# Altium PCB STM32F446DEV.PcbDoc
Units mm, origin at the board's own origin, x right, y up, seen from the top; angles counter-clockwise.
Board outline 40 x 40 mm, 2 copper layers (Top Layer, Bottom Layer); 14 components, 60 nets, 149 pads, 61 vias.
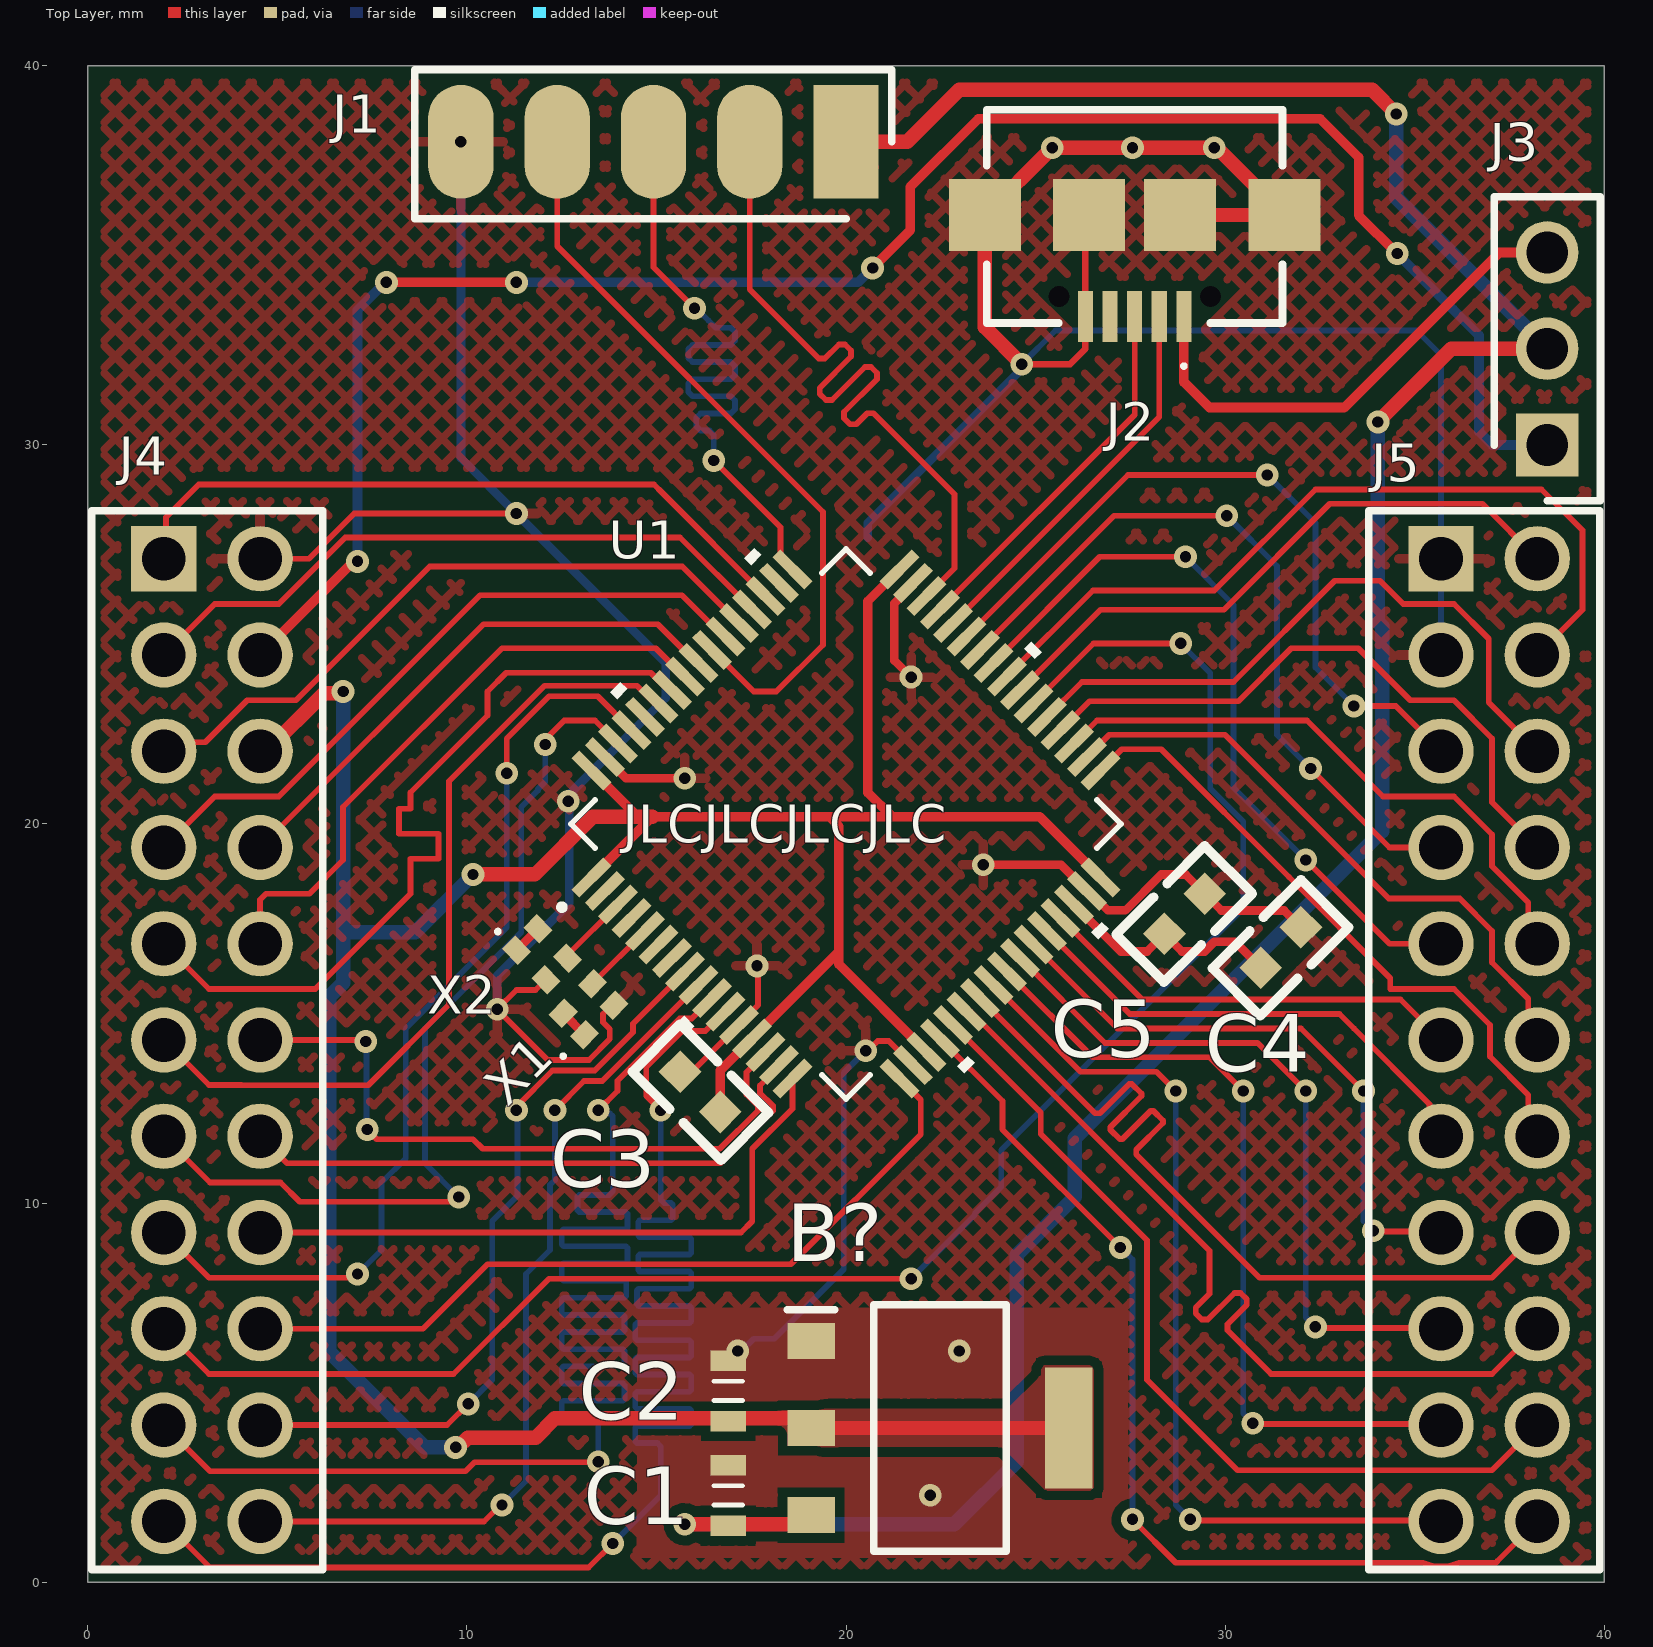
[diagram p0: Top Layer view]
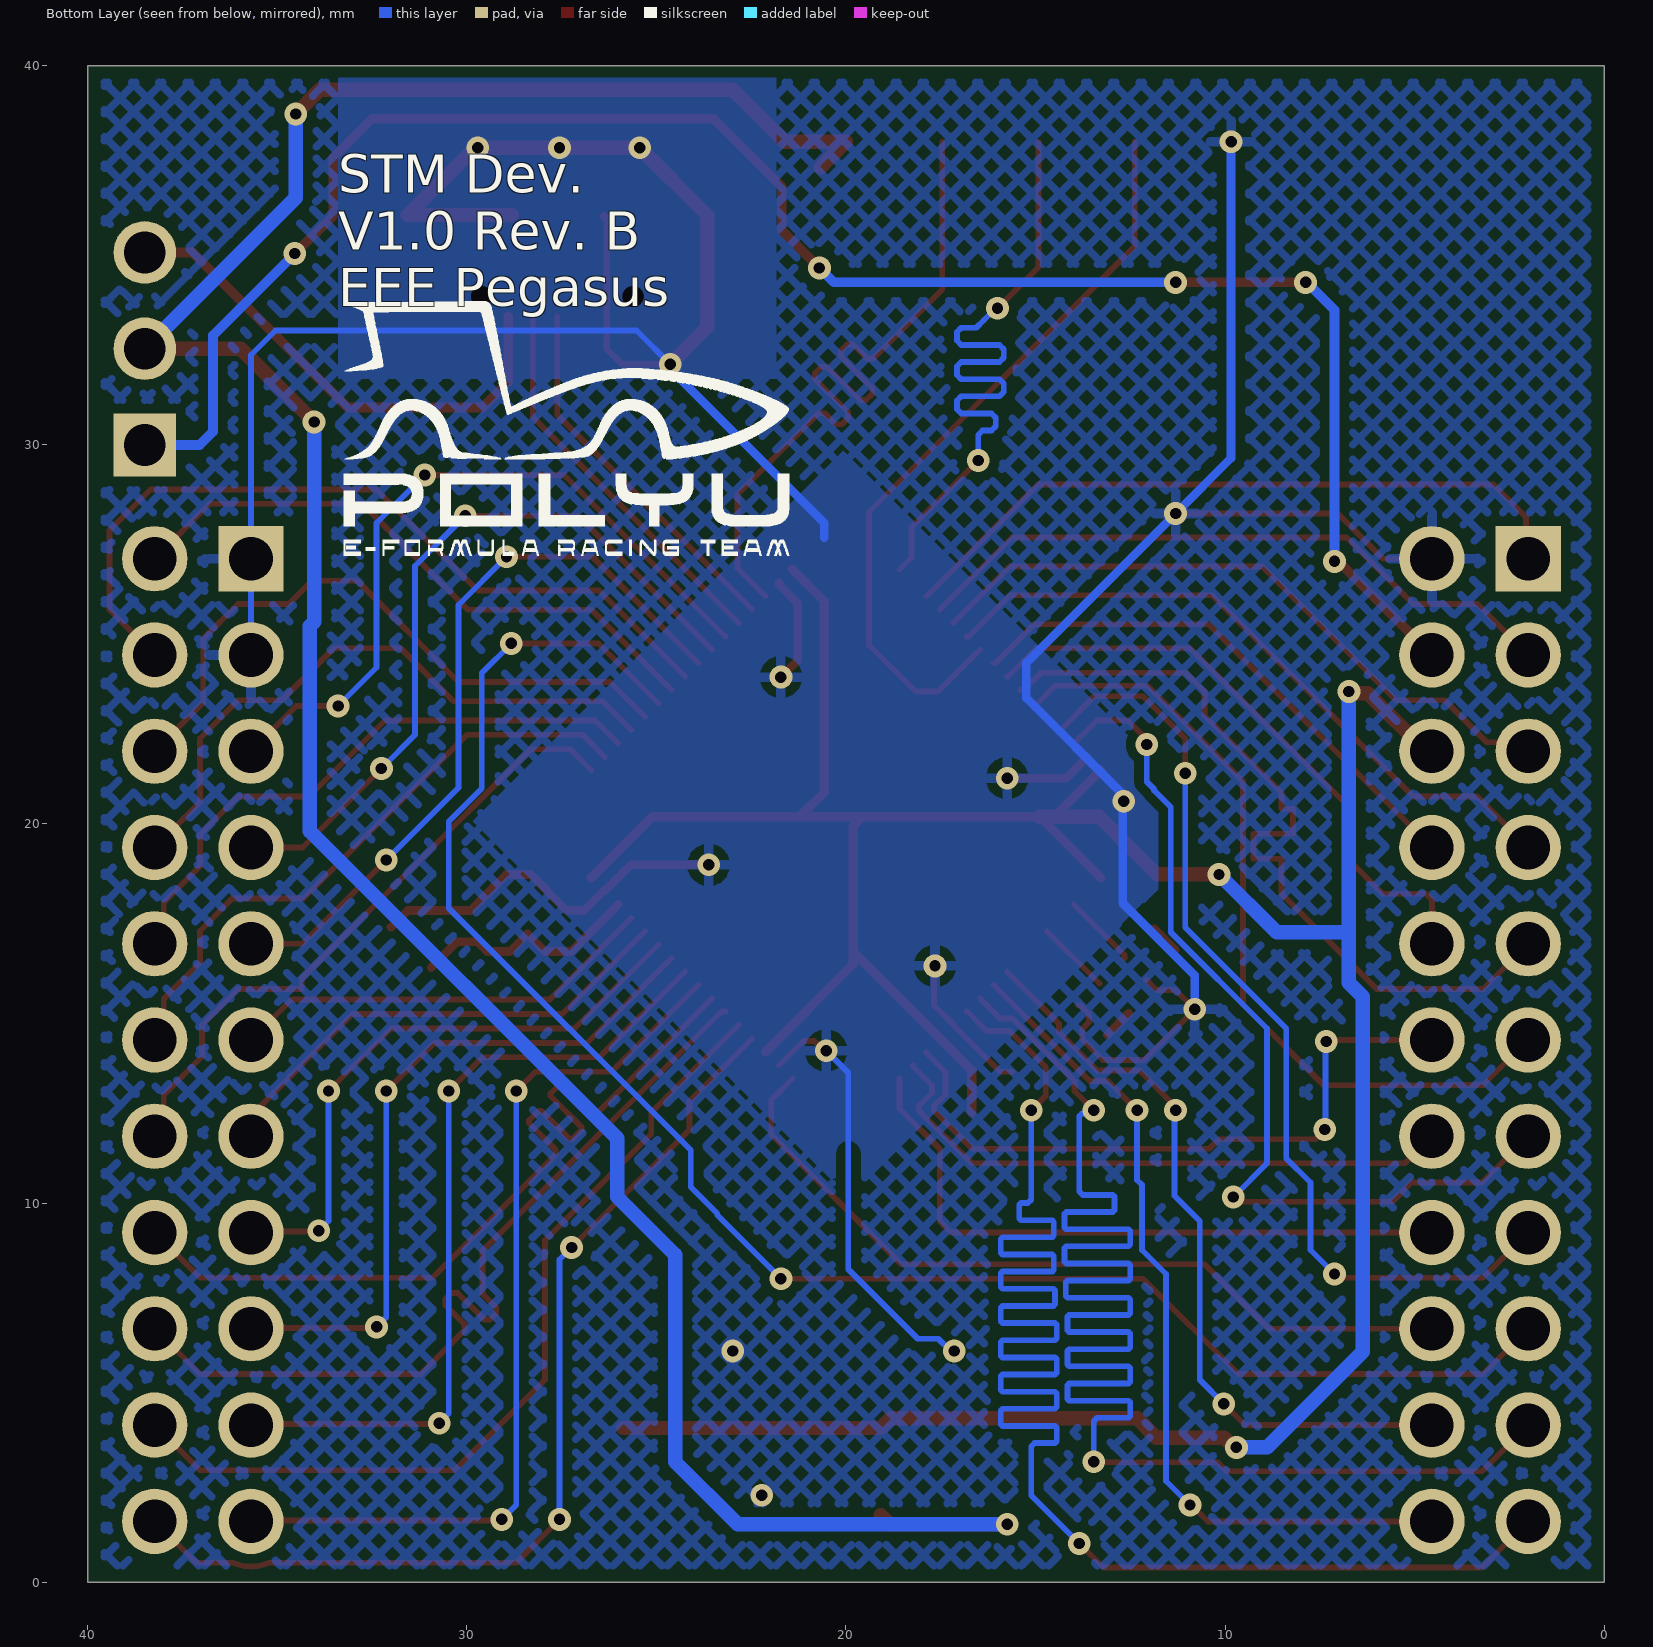
[diagram p1: Bottom Layer view, seen from below]
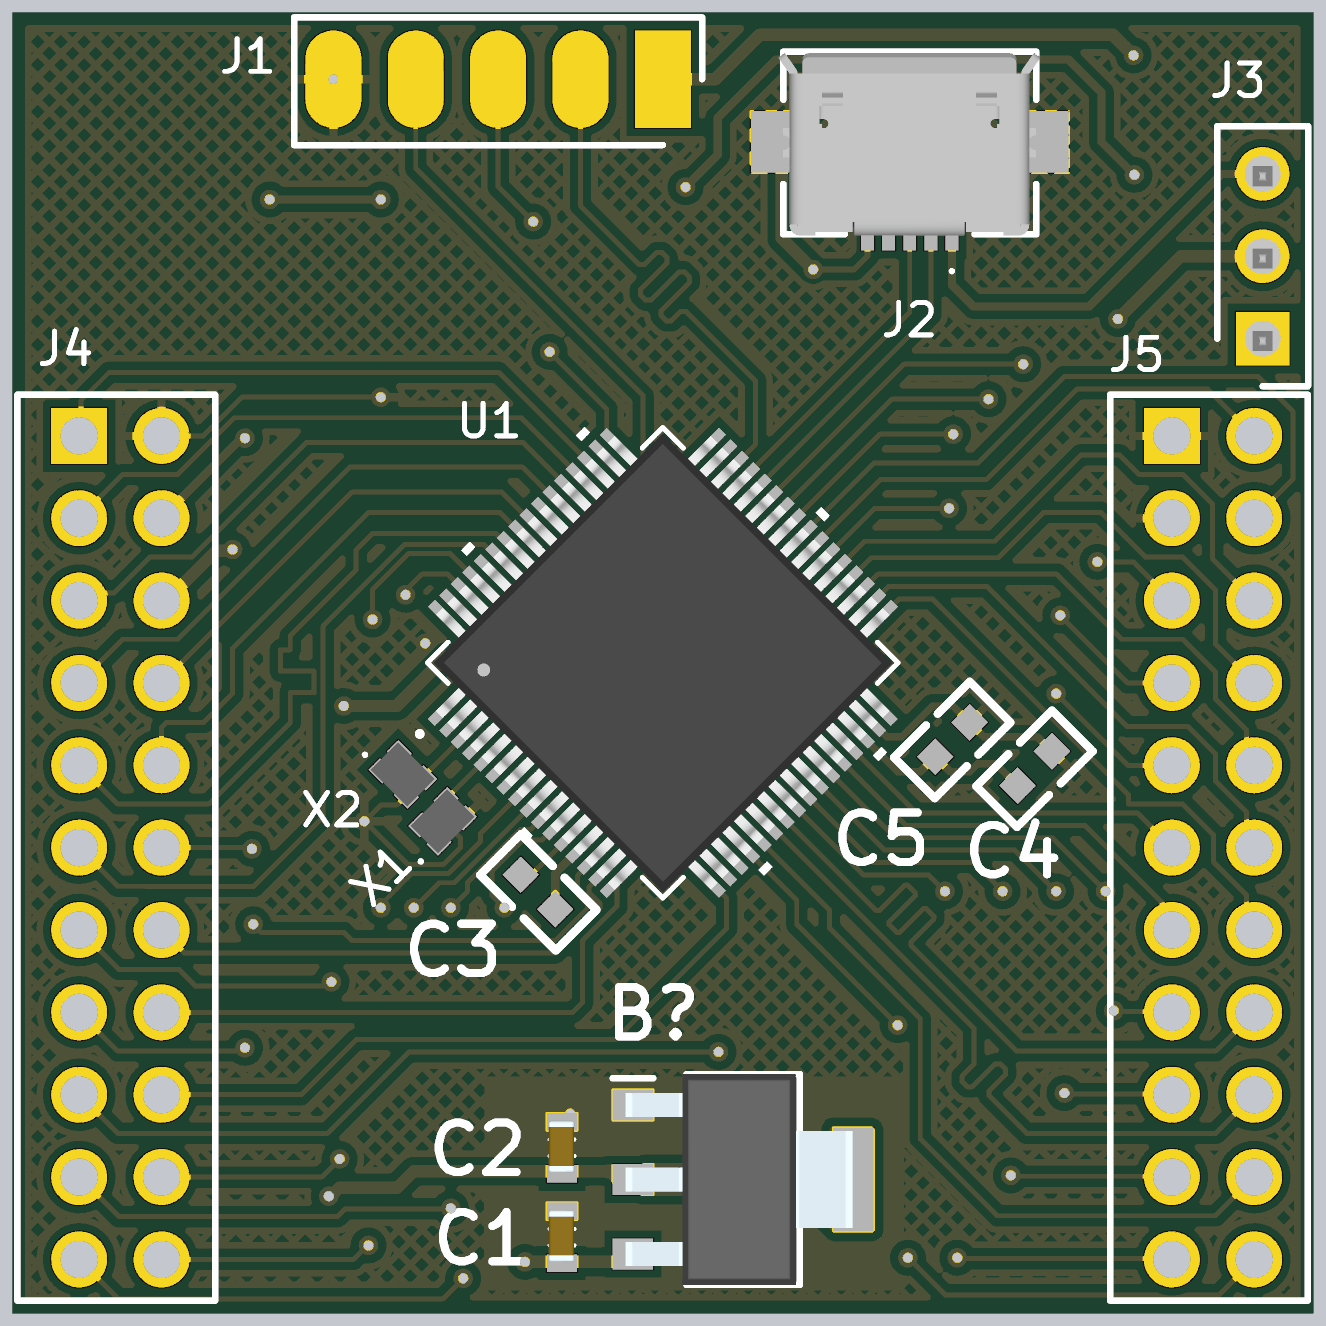
[diagram p2: 3D render of the assembled board from above, using the file's embedded part models]

## Layer stack, top to bottom
Top Solder: solder mask 0.0102, Solder Resist, Dk 3.5
Top Layer: signal copper 0.035
Dielectric 1: dielectric 0.32, FR-4, Dk 4.8
Bottom Layer: signal copper 0.035
Bottom Solder: solder mask 0.0102, Solder Resist, Dk 3.5

## Board outline
0,0 40,0 40,40 0,40

## Design rules (kind name [scope] priority, off if disabled: settings)
BoardOutlineClearance [All] p1: gap=0.3 ignorepadtopadclearanceinfootprint=FALSE except(0: Arc-SplitContinuation Track-SplitContinuation SMDPad-SplitContinuation THPad-OutlineEdge THPad-CavityEdge THPad-CutoutEdge THPad-SplitBarrior THPad-SplitContinuation Via-OutlineEdge Via-CavityEdge Via-CutoutEdge Via-SplitBarrior Via-SplitContinuation Fill-SplitContinuation Poly-SplitContinuation Region-SplitContinuation Text-SplitContinuation)
Clearance [All] p1: gap=0.254 ignorepadtopadclearanceinfootprint=TRUE except(0: Arc-Hole Track-Hole SMDPad-Hole THPad-Hole Via-Hole Fill-Hole Poly-Hole Region-Hole Text-Hole; 0.127: Arc-Arc Arc-Track Track-Track SMDPad-SMDPad; 0.2: Arc-SMDPad Track-SMDPad; 0.5: SMDPad-THPad THPad-THPad THPad-Via)
DiffPairsRouting "Schematic Differential Pairs Routing_1" [InNetClass('CAN1')] p1: maxlimit=0.254 minlimit=0.127 mostfreqgap=0.254 toplayer_minwidth=0.127 toplayer_maxwidth=0.381 toplayer_prefwidth=0.254 bottomlayer_minwidth=0.127 bottomlayer_maxwidth=0.381 bottomlayer_prefwidth=0.254 maxuncoupledlength=1
DiffPairsRouting "Schematic Differential Pairs Routing" [InNetClass('CAN2')] p2: maxlimit=0.254 minlimit=0.127 mostfreqgap=0.254 toplayer_minwidth=0.127 toplayer_maxwidth=0.381 toplayer_prefwidth=0.254 bottomlayer_minwidth=0.127 bottomlayer_maxwidth=0.381 bottomlayer_prefwidth=0.254 maxuncoupledlength=1
DiffPairsRouting [All] p3: maxlimit=0.384 minlimit=0.254 mostfreqgap=0.254 toplayer_minwidth=0.076 toplayer_maxwidth=0.381 toplayer_prefwidth=0.178 bottomlayer_minwidth=0.076 bottomlayer_maxwidth=0.381 bottomlayer_prefwidth=0.178 maxuncoupledlength=12.7
HoleSize [All] p1: absolutevalues=TRUE maxlimit=6.3 minlimit=0.3 maxpercent=80.000 minpercent=20.000
HoleToHoleClearance [All] p1: gap=0.6 allowstackedmicrovias=TRUE
MatchedLengths "Schematic Matched Net Lengths_7" [InNetClass('EADC1')] p1: tolerance=1 checknetsindiffpair=FALSE checkdiffpairvsdiffpair=TRUE checkxsignals=TRUE checkothers=TRUE
MatchedLengths "Schematic Matched Net Lengths_6" [InNetClass('I2C')] p2: tolerance=1 checknetsindiffpair=FALSE checkdiffpairvsdiffpair=TRUE checkxsignals=TRUE checkothers=TRUE
MatchedLengths "Schematic Matched Net Lengths_5" [InNetClass('UART1')] p3: tolerance=1 checknetsindiffpair=FALSE checkdiffpairvsdiffpair=TRUE checkxsignals=TRUE checkothers=TRUE
MatchedLengths "Schematic Matched Net Lengths_4" [InNetClass('SWD')] p4: tolerance=1 checknetsindiffpair=FALSE checkdiffpairvsdiffpair=TRUE checkxsignals=TRUE checkothers=TRUE
MatchedLengths "Schematic Matched Net Lengths_3" [InNetClass('CAN1')] p5: tolerance=1 checknetsindiffpair=FALSE checkdiffpairvsdiffpair=TRUE checkxsignals=TRUE checkothers=TRUE
MatchedLengths "Schematic Matched Net Lengths_2" [InNetClass('CAN2')] p6: tolerance=1 checknetsindiffpair=FALSE checkdiffpairvsdiffpair=TRUE checkxsignals=TRUE checkothers=TRUE
MatchedLengths "Schematic Matched Net Lengths_1" [InNetClass('EADC2')] p7: tolerance=1 checknetsindiffpair=FALSE checkdiffpairvsdiffpair=TRUE checkxsignals=TRUE checkothers=TRUE
MatchedLengths "Schematic Matched Net Lengths" [InNetClass('UART2')] p8: tolerance=1 checknetsindiffpair=FALSE checkdiffpairvsdiffpair=TRUE checkxsignals=TRUE checkothers=TRUE
MinimumAnnularRing [All] p1: minimumring=0.13
MinimumSolderMaskSliver [All] p1: minsoldermaskwidth=0.127
PolygonConnect [All] p1: connectstyle=Relief reliefconductorwidth=0.254 reliefentries=4 polygonreliefangle="90 Angle" airgapwidth=0.254
RoutingCorners [All] p1: cornerstyle=45-Degree minsetback=1.27 maxsetback=1.27
RoutingPriority [Not(InNetClass('Power'))] p1: routingpriority=1
RoutingVias [All] p1: holewidth=0.5 width=1 viastyle="Through Hole" minholewidth=0.3 minwidth=0.5 maxholewidth=1 maxwidth=1.27
SMDNeckDown [All] p1: percent=90.000
SMDToPlane [All] p1: distance=0
SilkToSilkClearance [All] p1: silktosilkclearance=0.127
SilkToSolderMaskClearance [IsPad] p1: minsilkscreentomaskgap=0.15 clearancetoexposedcopper=TRUE
SolderMaskExpansion [All] p1: expansion=0.038 istentingtop=FALSE
UnRoutedNet [All] p1: checkbadconnections=TRUE
ViasUnderSMD [All] p1: allowed=TRUE
Width PowerTraceWidth [InNetClass('Power')] p1: maxlimit=0.384 minlimit=0.254 preferedwidth=0.254
Width [InNetClass('All Nets')] p2: maxlimit=0.384 minlimit=0.127 preferedwidth=0.152
21 further rules are at their usual default settings.

## Classes and differential pairs
net class UART2: UART_DBG_RX UART_DBG_TX
net class UART1: BQ796XX_RX BQ796XX_TX
net class SWD: SWD_CLK SWD_IO SWD_TRACE
net class I2C: I2C_SCL I2C_SDA
net class EADC2: EADC2_MISO EADC2_MOSI EADC2_SCK
net class EADC1: EADC1_MISO EADC1_MOSI EADC1_SCK
net class CAN2: CAN_DBG_TX
net class CAN1: CAN_IBUS_RX CAN_IBUS_TX
component class Power: C1 C2 C3 C4 C5
component class MCU: U1 X1 X2
component class Connector: J1 J2 J3 J4 J5
differential pair USB: +USB_P -USB_N

## Components (designator, comment, footprint, x,y, rotation, side; value= is the part's Value field where it differs from the comment)
B? "NCV1117ST33T3G" SOT230P700X180-4N 22.479,4.064 r0 top
C1 "10u" 0603_SMD_C 16.891,2.286 r270 top
C2 "10u" 0603_SMD_C 16.891,5.042 r270 top
C3 "100n" 0603_SMD_RC 15.621,13.462 r315 top
C4 "*" 0603_SMD_RC 32.004,17.272 r225 top
C5 "*" 0603_SMD_RC 29.464,18.161 r225 top
J1 "Header 1x5" HDR_1X5_2.54_SMD 20,38 r180 top
J2 "UJ2-MIBH-G-SMT-TR" USB_B_5P_SMD 27.616,36.068 r180 top
J3 "Header 1x3" HDR_1X3_2.54_THD 38.5,30 r90 top
J4 "Header 1x5" HDR_2x11_2.54_THD 2,27 r0 top
J5 "Header 1x5" HDR_2x11_2.54_THD 35.7,27 r0 top
U1 "STM32F446RET6" LQFP64-STM32F446 20,20 r45 top
X1 "ECS-1612MV-080-CN-TR" 1612_OSXO_80 13.208,15.113 r45 top
X2 "ECS-327MV-CN-TR" 1612_OSXO_32.768 11.98,16.562 r315 top

## Footprints (in the part's own frame and the unit in brackets; to place one, negate y for a bottom-side part, rotate by r counter-clockwise, add the part's x,y. Pads: shape width x height; smd on the part's side, far side on the other; paste and mask are expansions set on the pad)
0603_SMD_C [mm]
  rect 0.54x0.94 smd: 1(-0.8,0) 2(0.8,0)
  silkscreen extent -0.25,-0.38 0.25,0.38, body extent -0.84,-0.42 0.76,0.38, height 0.9
0603_SMD_RC [mm]
  rect 0.8x0.8 smd: 1(0,0) 2(1.5,0)
  silkscreen extent -0.89,-0.89 2.41,0.89
1612_OSXO_32.768 [mm] "ECS-327MV-CN-TR"
  rect 0.6x0.5 smd: 1(-0.55,-0.4) 2(0.55,-0.4) 3(0.55,0.4) 4(-0.55,0.4)
  silkscreen extent -1.3,-0.45 -1.2,-0.35, body extent -0.8,-0.6 0.8,0.6, height 0.8
1612_OSXO_80 [mm] "ECS-1612MV-080-CN-TR"
  rect 0.6x0.5 smd: 1(-0.55,-0.4) 2(0.55,-0.4) 3(0.55,0.4) 4(-0.55,0.4)
  silkscreen extent -1.4,-0.45 -1.3,-0.35, body extent -0.8,-0.6 0.8,0.6, height 0.8
HDR_1X3_2.54_THD [mm]
  rect 1.65x1.65 / inner round 1.65 / far side rect 1.65x1.65 hole 1.1: 1(0,0)
  round 1.65 hole 1.1: 2(2.54,0) 3(5.08,0)
  silkscreen extent -1.47,-1.4 6.55,1.4, body extent -1.14,-1.21 6.08,1.2, height 3.1
HDR_1X5_2.54_SMD [mm]
  rect 1.725x3 / inner rect 1.725x3 / far side rect 0x0 all layers, no hole paste-2539.97: 1(0,0)
  oval 1.725x3 / inner oval 1.725x3 / far side round 0 all layers, no hole paste-2539.97: 2(2.54,0) 3(5.08,0) 4(7.62,0) 5(10.16,0)
  silkscreen extent -1.21,-1.91 11.37,2.03
HDR_2x11_2.54_THD [mm]
  rect 1.725x1.725 hole 1.15: 1(0,0)
  round 1.725 hole 1.15: 2(0,-2.54) 3(0,-5.08) 4(0,-7.62) 5(0,-10.16) 6(0,-12.7) 7(0,-15.24) 8(0,-17.78) 9(0,-20.32) 10(0,-22.86) 11(0,-25.4) 12(2.54,-25.4) 13(2.54,-22.86) 14(2.54,-20.32) 15(2.54,-17.78) 16(2.54,-15.24) 17(2.54,-12.7) 18(2.54,-10.16) 19(2.54,-7.62) 20(2.54,-5.08) 21(2.54,-2.54) 22(2.54,0)
  silkscreen extent -1.91,-26.67 4.19,1.27
LQFP64-STM32F446 [mm]
  rect 1.194x0.305 smd paste+0 mask+0: 1(-5.75,3.75) 2(-5.75,3.25) 3(-5.75,2.75) 4(-5.75,2.25) 5(-5.75,1.75) 6(-5.75,1.25) 7(-5.75,0.75) 8(-5.75,0.25) 9(-5.75,-0.25) 10(-5.75,-0.75) 11(-5.75,-1.25) 12(-5.75,-1.75) 13(-5.75,-2.25) 14(-5.75,-2.75) 15(-5.75,-3.25) 16(-5.75,-3.75) 33(5.75,-3.75) 34(5.75,-3.25) 35(5.75,-2.75) 36(5.75,-2.25) 37(5.75,-1.75) 38(5.75,-1.25) 39(5.75,-0.75) 40(5.75,-0.25) 41(5.75,0.25) 42(5.75,0.75) 43(5.75,1.25) 44(5.75,1.75) 45(5.75,2.25) 46(5.75,2.75) 47(5.75,3.25) 48(5.75,3.75)
  rect 0.305x1.194 smd paste+0 mask+0: 17(-3.75,-5.75) 18(-3.25,-5.75) 19(-2.75,-5.75) 20(-2.25,-5.75) 21(-1.75,-5.75) 22(-1.25,-5.75) 23(-0.75,-5.75) 24(-0.25,-5.75) 25(0.25,-5.75) 26(0.75,-5.75) 27(1.25,-5.75) 28(1.75,-5.75) 29(2.25,-5.75) 30(2.75,-5.75) 31(3.25,-5.75) 32(3.75,-5.75) 49(3.75,5.75) 50(3.25,5.75) 51(2.75,5.75) 52(2.25,5.75) 53(1.75,5.75) 54(1.25,5.75) 55(0.75,5.75) 56(0.25,5.75) 57(-0.25,5.75) 58(-0.75,5.75) 59(-1.25,5.75) 60(-1.75,5.75) 61(-2.25,5.75) 62(-2.75,5.75) 63(-3.25,5.75) 64(-3.75,5.75)
  silkscreen extent -6.93,-6.85 6.85,6.85, body extent -6,-6 6,6, height 1.6
SOT230P700X180-4N [mm]
  rect 1.25x0.95 smd: 1(-3.4,2.3) 2(-3.4,0) 3(-3.4,-2.3)
  rect 1.25x3.2 smd: 4(3.4,0)
  silkscreen extent -4.03,-3.25 1.75,3.25, body extent -3.63,-3.25 3.37,3.25, height 1.8
USB_B_5P_SMD [mm] "UJ2-MIBH-G-SMT-TR"
  rect 0.4x1.35 smd: 1(-1.3,2.675) 2(-0.65,2.675) 4(0.65,2.675) 5(1.3,2.675)
  rect 0.4x1.35 smd mask+0.038: 3(0,2.675)
  round 0.275 hole 0.55 unplated: MH1(-2,2.15) MH2(2,2.15)
  rect 1.9x1.9 smd: MP1(-3.95,0) MP2(-1.2,0) MP3(1.2,0) MP4(3.95,0)
  silkscreen extent -3.9,-2.78 3.9,4.04, body extent -4.04,-2.75 4.06,2.9, height 2.83

## Part data
B?: "ON SEMICONDUCTOR - NCV1117ST33T3G - Fixed LDO Voltage Regulator, 20V in, 1.07V Dropout, 3.3V/1A out, SOT-223-3", Manufacturer_Name=onsemi, Mouser Part Number=863-NCV1117ST33T3G, Datasheet Link=http://www.onsemi.com/pub/Collateral/NCP1117-D.PDF, Geometry.Height=1.8mm, Manufacturer_Part_Number=NCV1117ST33T3G, Mouser Price/Stock=https://www.mouser.co.uk/ProductDetail/onsemi/NCV1117ST33T3G?qs=8sOby8ZxZLHgqg5CFzeqiA%3D%3D
C1 C2: library part 0603_SMD_Capacitor, "0603 SMD Capacitor"
C3 C4 C5: library part "SMD 0603 Capacitor", "SMD 0603 Capacitor"
J1: Manufacturer_Name="TE Connectivity", Manufacturer_Part_Number=87224-5, Datasheet Link=https://www.arrow.com/en/products/87224-5/te-connectivity, Geometry.Height=10.745mm
J2: library part "USB_B 5P", "USB Connectors USB jack, 2.0, micro B type, 5 pin, horizontal, gold flash, SMT, TR", Manufacturer_Name="CUI Devices", Mouser Part Number=490-UJ2-MIBH-G-SMTTR, Datasheet Link=cuidevices.com/product/resource/uj2-mibh-g-smt-tr.pdf, Geometry.Height=3.15mm, Manufacturer_Part_Number=UJ2-MIBH-G-SMT-TR, Mouser Price/Stock=https://www.mouser.co.uk/ProductDetail/CUI-Devices/UJ2-MIBH-G-SMT-TR?qs=IS%252B4QmGtzzpvS1XQusp0iA%3D%3D
J3: "Pin Header 2.54mm Pitch STR DIP, 1x3Pin, G/F, LCP, 8.08mm*2.54mm*3.18mm, Color-Black, Bag", Manufacturer_Name="Amphenol Communications Solutions", Manufacturer_Part_Number=G800LR305018EU, Mouser Part Number=523-G800LR305018EU, Datasheet Link=https://cdn.amphenol-cs.com/media/wysiwyg/files/drawing/g800lrxxxxxxeu_1.pdf, Geometry.Height=10.82mm, Mouser Price/Stock=https://www.mouser.co.uk/ProductDetail/Amphenol-Commercial-Products/G800LR305018EU?qs=PzGy0jfpSMsZaVkTJmYyRA%3D%3D
J4 J5: library part "Header 2x11", "Header 2x11", Geometry.Height=10.745mm
U1: "No Description Available", Mfr_Name=STMicroelectronics, Copyright="Copyright (C) 2023 Ultra Librarian. All rights reserved.", Manufacturer_Part_Number=STM32F446RET6, RefDes=RefDes, Type=DEV
X1: library part "8M OSXO ECS", "Standard Clock Oscillators 8MHz CMOS 1.6-3.6V", Manufacturer_Name=ECS, Mouser Part Number=520-1612MV-080-CNT, Datasheet Link=https://www.arrow.com/en/products/ecs-1612mv-080-cn-tr/ecs-international, Geometry.Height=0.7mm, Manufacturer_Part_Number=ECS-1612MV-080-CN-TR, Mouser Price/Stock=https://www.mouser.co.uk/ProductDetail/ECS/ECS-1612MV-080-CN-TR?qs=MLItCLRbWswg5aTynjLSEQ%3D%3D
X2: library part "32.768k OSXO ECS", "Standard Clock Oscillators 32.768kHz LVCMOS 1.6-3.6V", Manufacturer_Name=ECS, Mouser Part Number=520-327MV-CNT, Datasheet Link=https://datasheet.datasheetarchive.com/originals/dk/DKDS42/DSANUWW0043417.pdf, Geometry.Height=0.7mm, Manufacturer_Part_Number=ECS-327MV-CN-TR, Mouser Price/Stock=https://www.mouser.co.uk/ProductDetail/ECS/ECS-327MV-CN-TR?qs=MLItCLRbWswJ3OzWTZUbfw%3D%3D

## Via types
v1: diameter 0.6, hole 0.3, Top Layer to Bottom Layer, tented both sides, 61 vias

## Nets (pads, with @x,y where several pads share a name; then routed paths per layer and width w, separated by ;. In a path a pad name is that pad's centre, name@x,y a point inside that pad or via, vN(x,y) a via of type N, cw(c..) or ccw(c..) an arc to the next point about the centre after c; other vN are vias at no path point)
3V3: B?.2 B?.4 C2.2 C3.2 J4.20 U1.1 U1.13 U1.19 U1.32 U1.48 U1.64 | length 87.2
  Top Layer w0.254: U1.1 14.89,20.193 19.558,20.193 ; U1.64 14.504,20.193 ; C3.2 16.682,13.5 U1.13 19.812,16.63 ; 21.209,20.193 20.574,20.828 20.574,25.877 U1.48 ; U1.19 19.812,16.299 19.812,16.63 ; U1.32 25.11,20.193 19.558,20.193 ; 19.558,20.193 19.812,19.939 19.812,16.63
  Top Layer w0.381: J4.20 4.697,21.92 6.23,23.453 6.689,23.453 v1(6.731,23.495) ; v1(9.699,3.551) 9.758,3.551 10.017,3.81 11.811,3.81 12.319,4.318 18.825,4.318 B?.2 B?.4 ; v1(10.16,18.669) 11.792,18.669 13.316,20.193 14.89,20.193
  Bottom Layer w0.381: v1(6.731,23.495) 6.731,17.145 ; v1(9.699,3.551) 9.694,3.556 8.89,3.556 6.368,6.078 6.368,15.446 6.731,15.809 6.731,17.145 ; v1(10.16,18.669) 8.636,17.145 6.731,17.145
+5V: B?.3 C1.2 J1.1 J3.2 | length 73.8
  Top Layer w0.381: v1(15.748,1.524) 18.839,1.524 B?.3 ; J1.1@20.672,37.328 J1.1 21.617,38 22.987,39.37 33.884,39.37 v1(34.519,38.735) ; v1(34.035,30.606) 35.969,32.54 J3.2
  Bottom Layer w0.381: v1(15.748,1.524) 22.86,1.524 24.511,3.175 24.511,8.636 26.035,10.16 26.035,11.704 34.145,19.814 34.145,25.224 34.035,25.334 v1(34.035,30.606) ; v1(34.519,38.735) 34.519,36.521 J3.2
ADC_CH0: J4.17 U1.14 | length 18
  Top Layer w0.152: J4.17 7.29,14.3 v1(7.328,14.262) ; v1(7.366,11.938) 7.62,11.684 10.16,11.684 10.414,11.43 16.668,11.43 17.675,12.437 17.675,12.563 17.375,12.863 17.375,13.452 17.879,13.955 U1.14
  Bottom Layer w0.152: v1(7.328,14.262) 7.347,14.243 7.347,11.957 v1(7.366,11.938)
ADC_CH1: J4.16 U1.15 | length 15.9
  Top Layer w0.152: J4.16 5.251,11.049 16.683,11.049 18.07,12.437 18.07,12.563 17.729,12.905 17.729,13.098 18.232,13.601 U1.15
ADC_CH2: J4.15 U1.16 | length 17.3
  Top Layer w0.152: J4.15 17.228,9.22 17.526,9.518 17.526,11.43 18.586,12.49 U1.16
ADC_CH3: J4.14 U1.17 | length 21.3
  Top Layer w0.152: J4.14 8.839,6.68 10.541,8.382 18.542,8.382 21.971,11.811 21.971,12.726 U1.17
ADC_CH4: J5.9 U1.26 | length 18.7
  Top Layer w0.152: U1.26 26.837,14.224 30.861,14.224 v1(32.131,12.954) ; v1(32.385,6.731) 32.41,6.706 35.674,6.706 J5.9
  Bottom Layer w0.152: v1(32.131,12.954) 32.131,6.985 v1(32.385,6.731)
ADC_CH5: J5.8 U1.27 | length 15.9
  Top Layer w0.152: U1.27 27.163,14.605 32.004,14.605 v1(33.655,12.954) ; v1(33.909,9.271) 33.934,9.246 35.674,9.246 J5.8
  Bottom Layer w0.152: v1(33.655,12.954) 33.655,9.525 v1(33.909,9.271)
ADC_CH6: J4.13 U1.8 | length 20.2
  Top Layer w0.152: J4.13 9.474,4.14 v1(10.033,4.699) ; v1(11.303,12.446) 11.303,12.541 12.259,13.497 13.37,13.497 14.378,14.505 14.378,14.732 U1.8
  Bottom Layer w0.152: v1(10.033,4.699) 10.668,5.334 10.668,9.525 11.335,10.192 11.335,12.414 v1(11.303,12.446)
ADC_CH7: J4.12 U1.9 | length 22.7
  Top Layer w0.152: J4.12 10.45,1.6 10.882,2.032 v1(10.922,2.032) ; v1(12.319,12.446) 13.09,13.217 13.57,13.217 15.509,15.157 ; 15.51,15.157 U1.9
  Bottom Layer w0.152: v1(10.922,2.032) 11.557,2.667 11.557,8.128 12.192,8.763 12.192,10.48 12.319,10.607 v1(12.319,12.446)
BOOT0: U1.60
BQ796XX_RX: J4.1 U1.51 | length 18.5
  Top Layer w0.152: J4.1@2.06,27.06 2.06,28.095 2.921,28.956 14.933,28.956 15.15,28.739 U1.51
  Top Layer w0.254: J4.1 J4.1@2.06,27.06
BQ796XX_TX: J4.2 U1.52 | length 17.6
  Top Layer w0.152: J4.2 3.347,25.807 5.034,25.807 6.786,27.559 15.623,27.559 U1.52
CAN_DBG_RX: J5.16 U1.33 | length 17.1
  Top Layer w0.152: U1.33 27.274,21.971 28.319,21.971 31.685,18.604 34.36,15.93 34.36,15.647 36.039,15.647 36.989,14.697 36.989,13.864 38.002,12.851 38.002,11.998 J5.16
CAN_DBG_TX: J5.17 U1.34 | length 16.4
  Top Layer w0.152: U1.34 26.948,22.352 30.003,22.352 34.321,18.034 36.193,18.034 37.047,17.179 37.047,16.346 38.002,15.391 38.002,14.538 J5.17
CAN_IBUS_RX: J4.8 U1.61 | length 25.5
  Top Layer w0.152: J4.8 3.193,8.027 7.011,8.027 v1(7.112,8.128) ; v1(11.049,21.336) 11.049,22.256 12.161,23.368 13.45,23.368 U1.61
  Bottom Layer w0.152: v1(7.112,8.128) 7.747,8.763 7.747,10.541 8.382,11.176 8.382,14.605 11.049,17.272 v1(11.049,21.336)
CAN_IBUS_TX: J4.7 U1.62 | length 24.7
  Top Layer w0.152: J4.7 3.219,10.541 5.08,10.541 5.588,10.033 9.652,10.033 v1(9.779,10.16) ; v1(12.065,22.098) 12.065,22.23 12.568,22.733 13.378,22.733 U1.62
  Bottom Layer w0.152: v1(9.779,10.16) 8.89,11.049 8.89,14.605 11.43,17.145 11.43,20.447 11.87,20.887 11.87,20.918 12.065,21.113 v1(12.065,22.098)
E5V: J3.1 J4.21 | length 50.3
  Top Layer w0.152: v1@7.009,26.929 v1(7.112,26.929)
  Top Layer w0.254: J4.21 v1@7.009,26.929 ; v1(7.874,34.29) v1(11.303,34.29) ; v1(20.701,34.671) 21.694,35.664 21.694,36.807 23.495,38.608 32.512,38.608 33.528,37.592 33.528,36.06 34.536,35.052 v1(34.544,35.052)
  Bottom Layer w0.254: v1(7.112,26.929) 7.112,33.561 7.841,34.29 v1(7.874,34.29) ; v1(11.303,34.29) 20.32,34.29 v1(20.701,34.671) ; v1(34.544,35.052) 36.02,33.576 36.703,32.893 36.703,30.353 37.056,30 J3.1
EADC1_MISO: J5.14 U1.22 | length 22.8
  Top Layer w0.152: U1.22 23.283,15.05 29.591,8.742 29.591,7.609 29.227,7.244 29.227,7.084 29.387,6.924 29.547,6.924 30.251,7.629 30.411,7.629 30.571,7.469 30.571,7.309 30.063,6.8 30.063,6.64 31.165,5.538 31.216,5.487 37.047,5.487 J5.14
EADC1_MOSI: J5.15 U1.23 | length 22.8
  Top Layer w0.152: U1.23 26.518,12.421 26.572,12.367 26.698,12.367 27.474,13.143 27.538,13.143 27.794,12.887 27.794,12.823 26.97,11.999 26.97,11.935 27.226,11.679 27.29,11.679 28.042,12.432 28.106,12.432 28.362,12.176 28.362,12.112 27.658,11.408 27.658,11.281 29.162,9.777 30.912,8.027 37.047,8.027 J5.15
EADC1_SCK: J5.13 U1.21 | length 23.3
  Top Layer w0.152: U1.21 25.137,12.388 25.137,11.82 27.94,9.017 27.94,5.334 30.327,2.947 37.047,2.947 J5.13
EADC2_MISO: J4.10 U1.10 | length 47
  Top Layer w0.152: J4.10 3.219,2.921 9.96,2.921 10.196,3.157 13.444,3.157 v1(13.462,3.175) ; v1(13.462,12.446) 13.464,12.446 13.971,12.953 13.971,13.223 15.615,14.867 15.928,14.867 U1.10
  Bottom Layer w0.152: v1(13.462,3.175) 13.462,4.041 13.462,4.244 13.373,4.333 12.546,4.333 12.5,4.378 12.5,4.74 12.546,4.785 14.114,4.785 14.159,4.831 14.159,5.192 14.114,5.238 12.546,5.238 12.5,5.283 12.5,5.645 12.546,5.69 14.114,5.69 14.159,5.735 14.159,6.097 14.114,6.143 12.546,6.143 12.5,6.188 12.5,6.55 12.546,6.595 14.114,6.595 14.159,6.64 14.159,7.002 14.114,7.047 12.546,7.047 12.5,7.093 12.5,7.454 12.546,7.5 14.159,7.5 14.204,7.545 14.204,7.907 14.159,7.952 12.546,7.952 12.5,7.997 12.5,8.359 12.546,8.405 14.191,8.405 14.236,8.45 14.236,8.812 14.191,8.857 12.546,8.857 12.5,8.902 12.5,9.264 12.546,9.309 14.191,9.309 14.236,9.355 14.236,9.716 14.191,9.762 12.963,9.762 12.917,9.807 12.917,10.169 12.963,10.214 13.754,10.214 13.843,10.303 13.843,12.29 13.773,12.36 13.548,12.36 v1(13.462,12.446)
EADC2_MOSI: J4.11 U1.11 | length 47
  Top Layer w0.152: J4.11 3.219,0.381 13.208,0.381 v1(13.843,1.016) ; v1(15.113,12.446) 14.732,12.827 14.732,13.589 15.684,14.541 16.286,14.541 16.795,15.05 U1.11
  Bottom Layer w0.152: v1(13.843,1.016) 15.113,2.286 15.113,3.5 15.113,3.576 15.024,3.665 14.484,3.665 14.438,3.71 14.438,4.072 14.484,4.118 15.873,4.118 15.918,4.163 15.918,4.525 15.873,4.57 14.484,4.57 14.438,4.615 14.438,4.977 14.484,5.022 15.873,5.022 15.918,5.068 15.918,5.43 15.873,5.475 14.484,5.475 14.438,5.52 14.438,5.882 14.484,5.927 15.873,5.927 15.918,5.972 15.918,6.334 15.873,6.38 14.484,6.38 14.438,6.425 14.438,6.787 14.484,6.832 15.873,6.832 15.918,6.877 15.918,7.239 15.873,7.284 14.529,7.284 14.483,7.33 14.483,7.692 14.529,7.737 15.873,7.737 15.918,7.782 15.918,8.144 15.873,8.189 14.561,8.189 14.516,8.234 14.516,8.596 14.561,8.642 15.873,8.642 15.918,8.687 15.918,9.049 15.873,9.094 14.561,9.094 14.516,9.139 14.516,9.501 14.561,9.546 15.382,9.546 15.428,9.592 15.428,9.953 15.382,9.999 15.202,9.999 15.113,10.088 15.113,11.684 v1(15.113,12.446)
EADC2_SCK: J4.9 U1.38 | length 46.9
  Top Layer w0.152: J4.9 3.193,5.487 9.647,5.487 12.161,8.001 v1(21.717,8.001) ; U1.38 26.533,24.765 v1(28.829,24.765)
  Bottom Layer w0.152: v1(21.717,8.001) 23.396,9.68 23.396,9.72 24.097,10.42 24.097,11.397 30.48,17.78 30.48,20.066 29.609,20.937 29.609,23.985 v1(28.829,24.765)
EADC_CS: J5.12 U1.20 | length 26.4
  Top Layer w0.152: U1.20 24.13,12.688 24.13,11.936 v1(27.24,8.825) ; v1(27.559,1.651) 28.702,0.508 35.22,0.508 ccw(c35.7,1.6) 36.18,0.508 37.148,0.508 37.193,0.553 J5.12
  Bottom Layer w0.152: v1(27.24,8.825) 27.559,8.507 v1(27.559,1.651)
GND: B?.1 C1.1 C2.1 C3.1 C4.1 C5.1 J1.5 J2.5 J2.MP1 J2.MP2 J2.MP3 J2.MP4 J4.22 J5.1 J5.2 U1.12 U1.18 U1.31 U1.47 U1.63 X1.2 X2.2 | length 118.9
  Top Layer w0.152: J4.22 5.832,27 7.026,28.194 v1(11.303,28.194) ; X2.2 12.073,15.89 11.804,15.621 11.303,15.621 v1(10.795,15.113) 12.132,13.776 13.219,13.776 13.767,14.325 13.767,14.591 13.589,14.769 13.589,14.986 13.822,15.219 X1.2 ; C3.1 15.937,13.462 U1.12 17.172,14.718 17.682,15.228 17.682,16.227 v1(17.653,16.256) ; v1(20.524,14.02) 20.58,14.02 20.837,14.277 21.127,14.277 U1.18
  Top Layer w0.178: v1(24.638,32.131) 25.908,32.131 26.316,32.539 J2.5 J2.MP3@26.316,35.968
  Top Layer w0.229: U1.63 14.195,21.209 v1(15.748,21.209) ; v1(21.717,23.876) 21.277,24.316 21.277,25.826 21.768,26.317 U1.47 ; v1(23.622,18.923) 25.673,18.923 U1.31 26.401,18.232 26.913,17.72 27.372,17.72 28.321,18.669 28.956,18.669 C5.1 29.909,17.716 31.559,17.716 C4.1 ; J2.MP3@26.316,35.968 J2.MP3@26.375,36.027
  Top Layer w0.381: v1(24.638,32.131) 23.666,33.103 J2.MP4 v1(25.444,37.846) v1(27.559,37.846) v1(29.718,37.846) 29.788,37.846 J2.MP1 J2.MP2
  Bottom Layer w0.152: J4.22 J4.22@4.723,27.183 ; v1(17.145,6.096) 17.243,6.096 17.568,6.421 18.105,6.421 19.939,8.255 19.939,13.435 v1(20.524,14.02) ; v1(24.638,32.131) 25.529,33.022 35.05,33.022 35.7,32.372 J5.1 J5.2
  Bottom Layer w0.229: v1(9.84,38) 9.84,34.356 9.84,29.657 v1(11.303,28.194) 15.24,24.257 15.24,23.323 12.7,20.783 v1@12.7,20.574 ; v1(10.795,15.113) 10.795,16.002 12.7,17.907 v1@12.7,20.574 ; v1(12.672,20.602) v1@12.7,20.574 ; 20.574,27.559 20.574,27.94 24.638,32.004 v1(24.638,32.131)
  other v1: 22.225,2.286 22.987,6.096
GPI_CH0: J5.6 U1.29 | length 11.4
  Top Layer w0.152: U1.29 27.814,15.368 34.632,15.368 J5.6
GPI_CH1: J5.7 U1.28 | length 13
  Top Layer w0.152: U1.28 27.489,14.986 33.02,14.986 33.401,14.605 35.399,12.607 35.399,12.061 J5.7
GPI_CH2: J5.10 U1.25 | length 21.4
  Top Layer w0.152: U1.25 26.511,13.843 29.591,13.843 v1(30.48,12.954) ; v1(30.734,4.191) 30.759,4.166 35.674,4.166 J5.10
  Bottom Layer w0.152: v1(30.48,12.954) 30.48,4.445 v1(30.734,4.191)
GPI_CH3: J5.11 U1.24 | length 24.1
  Top Layer w0.152: U1.24 26.184,13.462 28.194,13.462 v1(28.702,12.954) ; v1(29.083,1.651) 29.108,1.626 35.674,1.626 J5.11
  Bottom Layer w0.152: v1(28.702,12.954) 28.702,2.032 v1(29.083,1.651)
GPO_CH0: J5.18 U1.35 | length 15.9
  Top Layer w0.152: U1.35 26.622,22.733 32.162,22.733 34.168,20.727 36.039,20.727 37.047,19.719 37.047,18.886 38.002,17.931 38.002,17.078 J5.18
GPO_CH1: J5.19 U1.36 | length 16.6
  Top Layer w0.152: U1.36 26.423,23.241 30.353,23.241 31.75,24.638 33.516,24.638 34.887,23.267 36.039,23.267 37.047,22.259 37.047,20.573 J5.19
GPO_CH2: J5.20 U1.37 | length 17.3
  Top Layer w0.152: U1.37 26.224,23.749 30.226,23.749 32.893,26.416 34.092,26.416 34.701,25.807 36.039,25.807 36.957,24.89 36.957,23.203 J5.20
GPO_CH3: J5.5 U1.41 | length 20
  Top Layer w0.152: U1.41 26.697,27.051 v1(28.956,27.051) ; v1(32.131,19.05) 34.341,16.84 J5.5
  Bottom Layer w0.152: v1(28.956,27.051) 30.226,25.781 30.226,20.955 v1(32.131,19.05)
GPO_CH4: J5.4 U1.42 | length 19.9
  Top Layer w0.152: U1.42 27.07,28.131 v1(30.045,28.131) ; v1(32.258,21.463) 34.341,19.38 J5.4
  Bottom Layer w0.152: v1(30.045,28.131) 31.369,26.807 31.369,22.352 v1(32.258,21.463)
GPO_CH5: J5.3 U1.43 | length 19.5
  Top Layer w0.152: U1.43 27.442,29.21 v1(31.115,29.21) ; v1(33.401,23.114) 34.506,23.114 J5.3
  Bottom Layer w0.152: v1(31.115,29.21) 32.385,27.94 32.385,24.13 v1(33.401,23.114)
HSE_IN: U1.5 X1.3 | length 2
  Top Layer w0.152: X1.3 13.314,15.789 U1.5
HSE_OUT: U1.6
I2C_SCL: J4.5 U1.58 | length 21.6
  Top Layer w0.152: J4.5 3.193,15.647 5.995,15.647 8.509,18.161 8.509,18.345 8.509,19.082 9.246,19.082 9.246,19.742 8.207,19.742 8.207,20.403 8.509,20.403 8.509,20.828 10.541,22.86 10.541,23.495 11.034,23.988 14.85,23.988 15.303,23.536 U1.58
I2C_SDA: J4.6 U1.59 | length 21.7
  Top Layer w0.152: J4.6 3.19,13.11 4.043,13.11 4.046,13.107 7.392,13.107 9.525,15.24 9.525,21.127 12.045,23.647 14.484,23.647 14.949,23.182 U1.59 U1.59@15.05,23.081
LED_PWR: U1.2
LED_STS: U1.50
LSE_IN: U1.3 X2.3 | length 2
  Top Layer w0.152: X2.3 12.652,16.541 U1.3
LSE_OUT: U1.4
NetC4_2: C4.2 C5.2 U1.30 | length 6.2
  Top Layer w0.229: U1.30 27.252,16.637 27.94,16.637 C5.2 28.867,16.637 29.464,16.637 29.718,16.891 30.264,16.891 C4.2
NetX1_1: X1.1 X1.4 | length 0.8
  Top Layer w0.229: X1.4 X1.1
NetX2_1: X2.1 X2.4 | length 0.8
  Top Layer w0.229: X2.1 X2.4
NRST: U1.7
PWM_CH0: J4.19 U1.56 | length 14.4
  Top Layer w0.152: J4.19 10.433,25.273 15.034,25.273 16.064,24.243 U1.56
PWM_CH1: J4.18 U1.57 | length 16.3
  Top Layer w0.152: J4.18 4.54,18.002 4.699,18.161 5.842,18.161 6.731,19.05 6.731,20.447 10.922,24.638 14.979,24.638 15.728,23.889 U1.57
PWM_CH2: J5.22 U1.39 | length 16.3
  Top Layer w0.152: U1.39 26.715,25.654 29.972,25.654 32.766,28.448 36.792,28.448 J5.22
PWM_CH3: J5.21 U1.40 | length 21.5
  Top Layer w0.152: U1.40 26.516,26.162 29.718,26.162 32.385,28.829 38.354,28.829 39.433,27.75 39.433,25.653 J5.21
SWD_CLK: J1.3 U1.49 | length 18.9
  Top Layer w0.152: J1.3 14.92,34.691 v1(16.002,33.609) ; v1(16.51,29.591) 18.271,27.83 18.271,27.032 U1.49
  Bottom Layer w0.152: v1(16.002,33.609) 16.048,33.609 16.374,33.283 16.563,33.094 16.957,33.094 17.07,32.981 17.07,32.755 16.957,32.642 15.949,32.642 15.836,32.528 15.836,32.302 15.949,32.189 16.957,32.189 17.07,32.076 17.07,31.85 16.957,31.737 15.949,31.737 15.836,31.624 15.836,31.397 15.949,31.284 16.957,31.284 17.07,31.171 17.07,30.945 16.957,30.832 16.161,30.832 16.048,30.719 16.048,30.493 16.161,30.38 16.397,30.38 16.51,30.266 16.51,29.909 v1(16.51,29.591)
SWD_IO: J1.2 U1.46 | length 19.6
  Top Layer w0.152: J1.2 17.46,34.102 19.021,32.541 19.282,32.28 19.442,32.28 19.815,32.653 19.975,32.653 20.135,32.493 20.135,32.333 19.309,31.507 19.309,31.347 19.469,31.187 19.629,31.187 20.499,32.057 20.659,32.057 20.819,31.897 20.819,31.737 19.949,30.867 19.949,30.707 20.109,30.547 20.269,30.547 20.562,30.84 20.722,30.84 20.776,30.786 22.86,28.702 22.86,26.749 U1.46
SWD_TRACE: J1.4 U1.55 | length 20.1
  Top Layer w0.152: J1.4 12.38,35.245 19.392,28.233 19.392,24.726 18.161,23.495 17.566,23.495 U1.55
U5V: J2.1 J3.3 | length 13.3
  Top Layer w0.254: J2.1 28.916,31.663 29.591,30.988 33.147,30.988 37.239,35.08 J3.3
UART_DBG_RX: J4.4 U1.54 | length 18
  Top Layer w0.152: J4.4 3.347,20.727 5.034,20.727 10.342,26.035 15.676,26.035 16.762,24.95 U1.54
UART_DBG_TX: J4.3 U1.53 | length 17.8
  Top Layer w0.152: J4.3 2.238,22.158 3.091,22.158 4.201,23.267 5.487,23.267 9.017,26.797 15.678,26.797 U1.53
USB_N: J2.2 U1.44 | length 10.3
  Top Layer w0.152: U1.44 28.266,30.741 J2.2
USB_P: J2.3 U1.45 | length 9.9
  Top Layer w0.152: U1.45 27.616,30.798 J2.3
pads on no net: J2.4 J2.MH1 J2.MH2

## Polygon pours and split planes (outlines as drawn)
GND on Bottom Layer "GND_L02_P014" (hatched 45Degree grid 0.508 track 0.203, pour order 14): 0,41.656 0.508,42.164 42.926,42.164 42.926,0.254 42.672,0 0,0
GND on Bottom Layer "GND_L02_P000" (solid, pour order 0): 20.066,29.845 10.287,20.066 10.287,19.812 19.939,10.16 29.845,20.066
GND on Bottom Layer "GND_L02_P007" (solid, pour order 7): 21.844,39.878 33.401,39.878 33.401,31.75 21.844,31.75
GND on Top Layer "GND_L01_P016" (solid, pour order 16): 14.506,7.307 14.574,7.239 27.432,7.239 27.432,0.762 27.305,0.635 14.478,0.635
3V3 on Top Layer "3V3_L01_P015" (solid, pour order 15): 26.543,5.715 25.146,5.715 25.146,5.461 24.13,4.826 18.2,4.771 18.2,3.335 24.023,3.297 25.273,2.413 26.543,2.413
GND on Top Layer "GND_L01_P013" (hatched 45Degree grid 0.508 track 0.203, pour order 13): 0,40.703 1.651,40.703 40.703,40.703 41.021,2.921 41.021,0 0,0 0,3.048

## Silkscreen, mask and mechanical layers (free items; w line width, h text height)
Top Overlay:
  text "JLCJLCJLCJLC" at 14.108,19.501 h1
Bottom Overlay:
  drawing of 30 lines, arcs and shapes, not listed
  text "STM Dev. / V1.0 Rev. B / EEE Pegasus" at 33.401,33.655 h1
Outline:
  the board outline again, w0.127